# Altium PCB Vent_pcb.PcbDoc
Units mm, origin at the board's own origin, x right, y up, seen from the top; angles counter-clockwise.
Board outline 60 x 90 mm, 2 copper layers (Top Layer, Bottom Layer); 56 components, 64 nets, 202 pads, 38 vias.
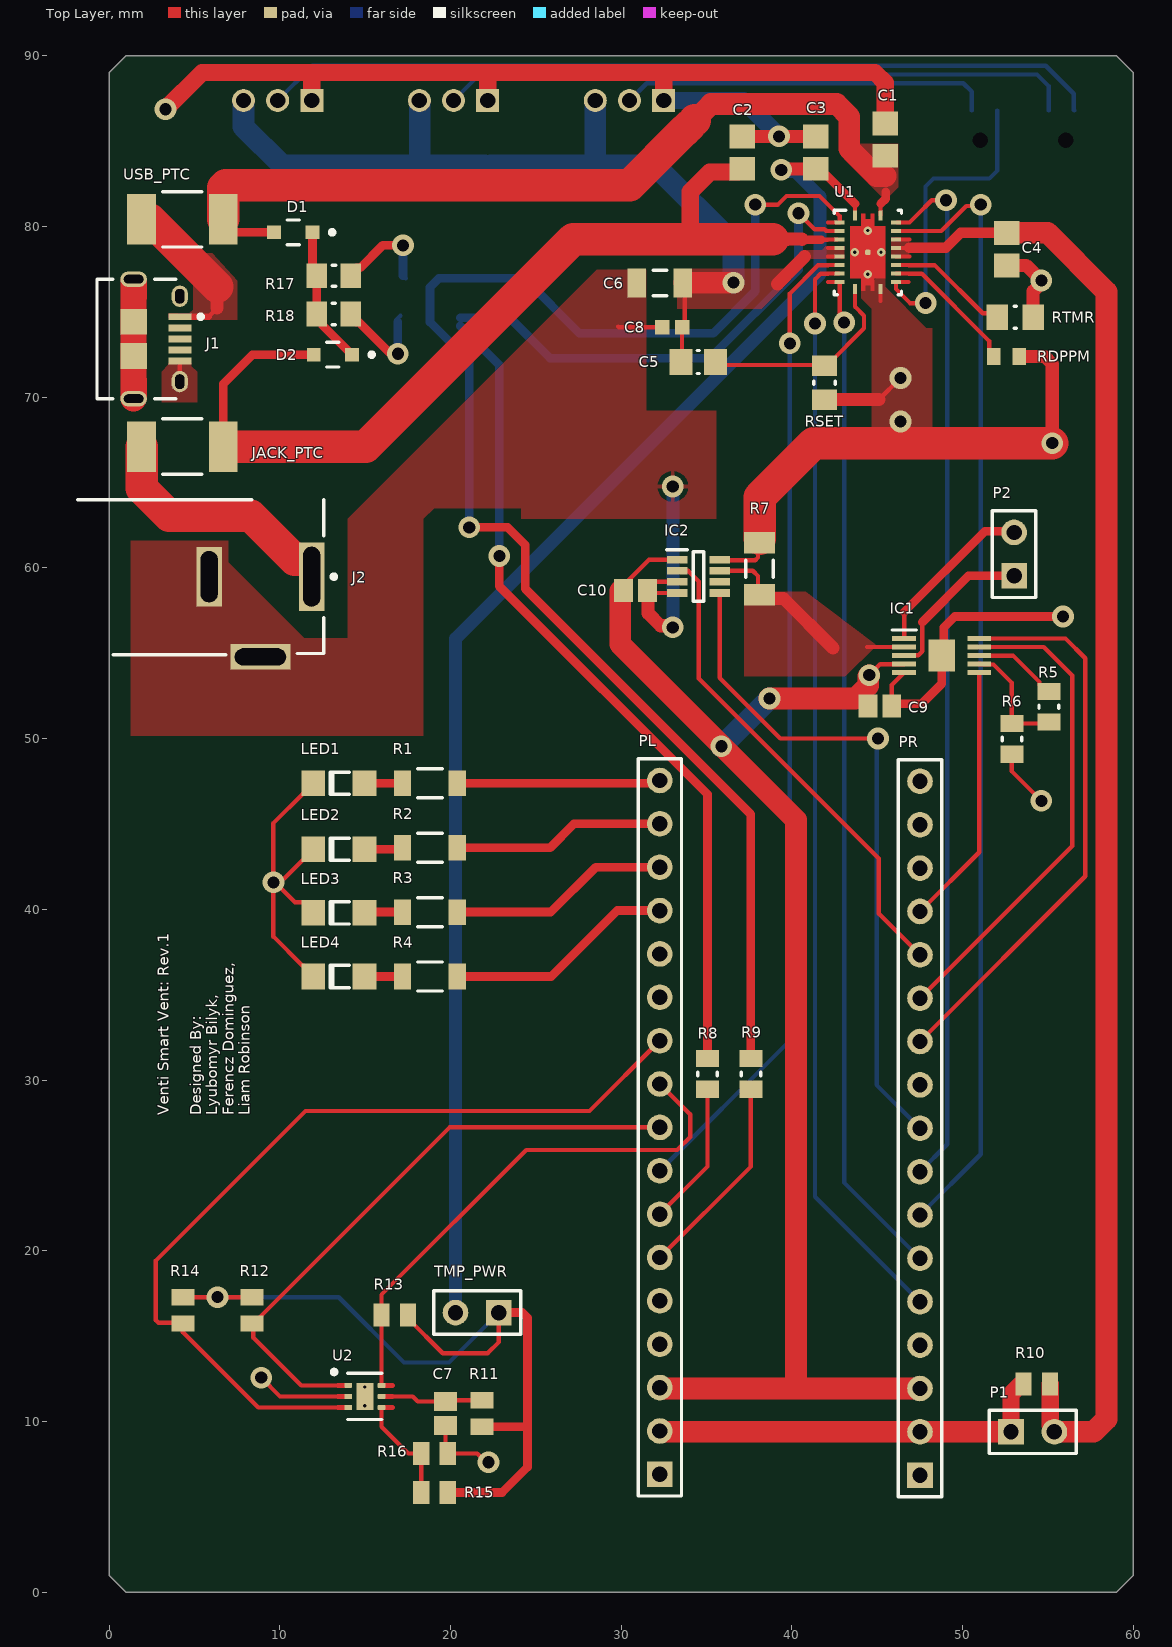
[diagram p0: Top Layer view]
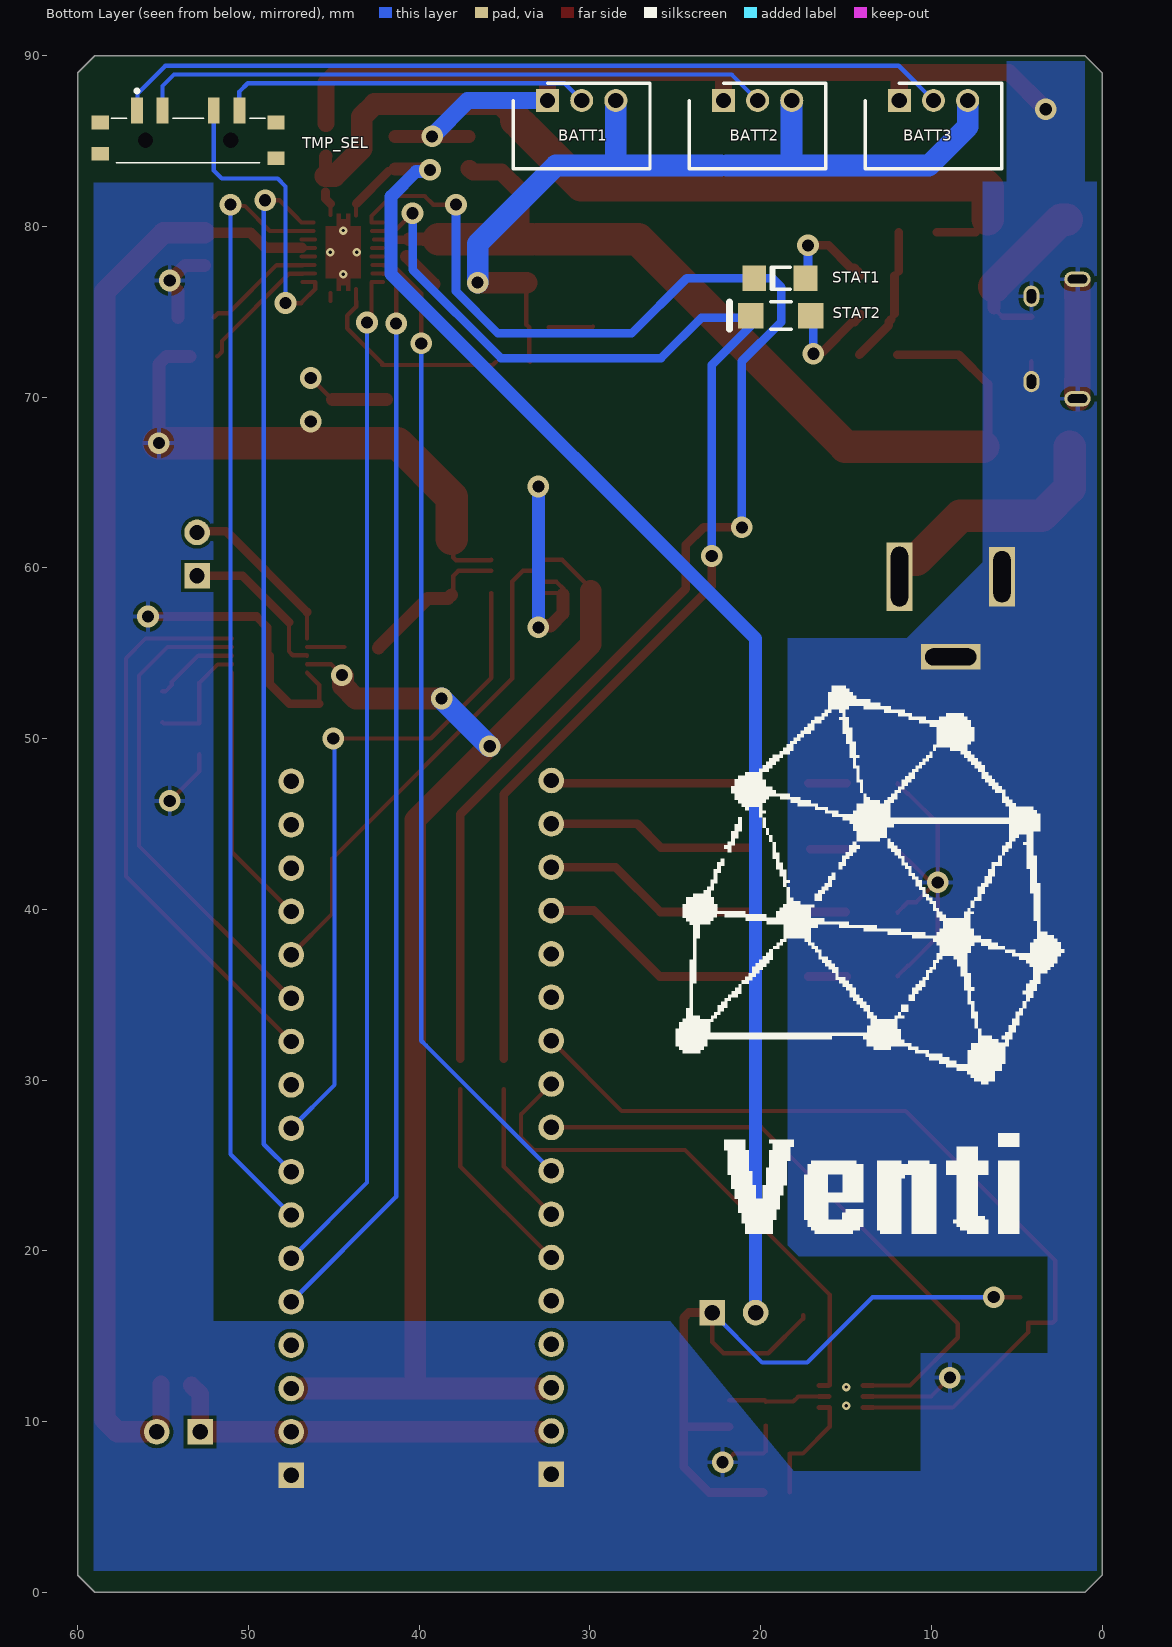
[diagram p1: Bottom Layer view, seen from below]
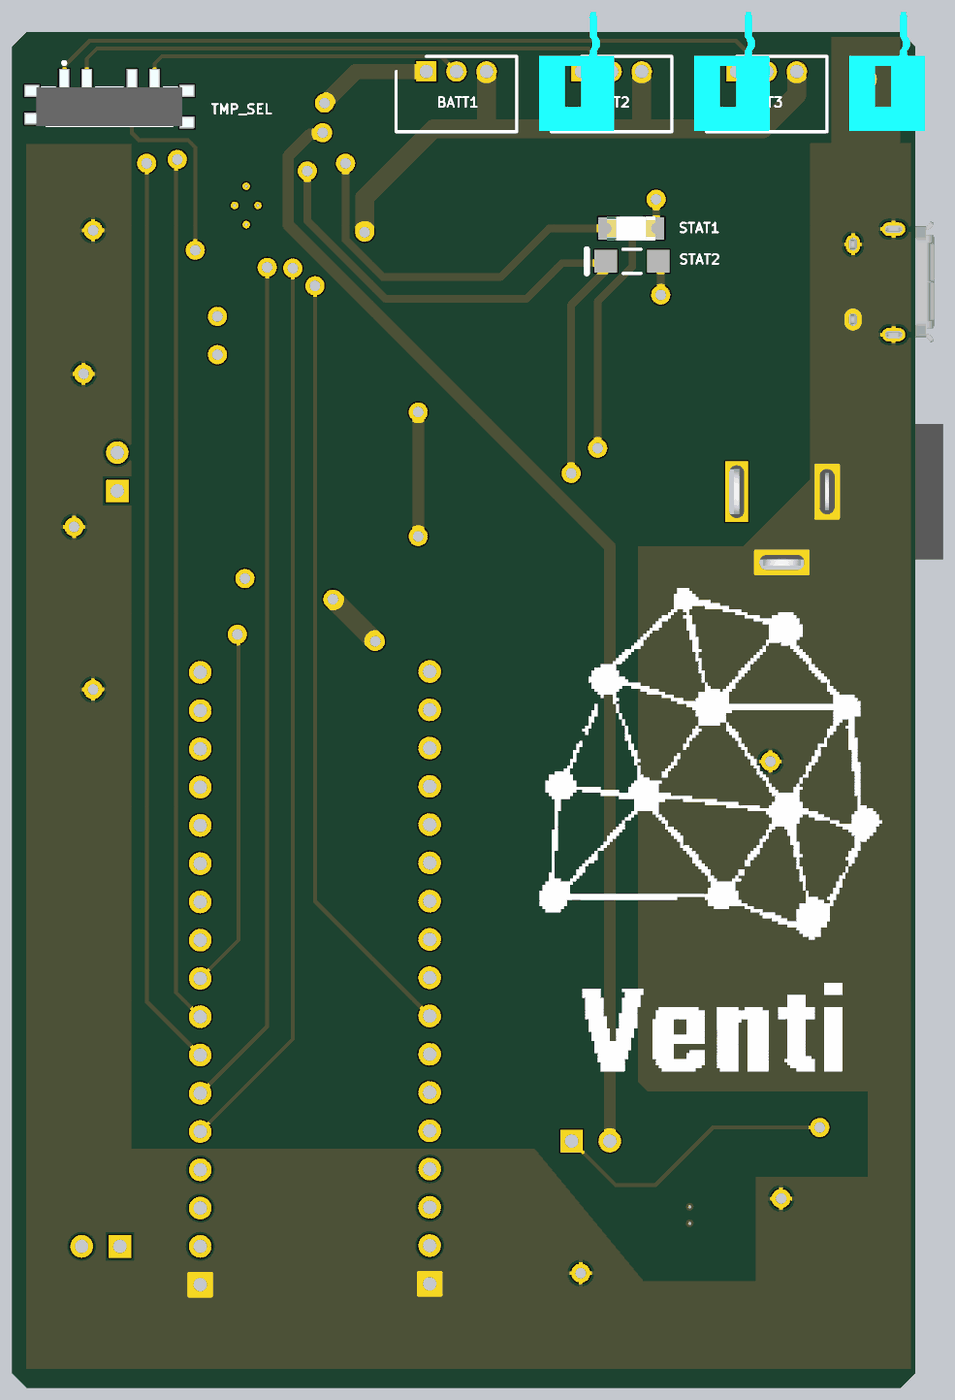
[diagram p2: 3D render of the assembled board from below, using the file's embedded part models]

## Layer stack, top to bottom
Top Solder: solder mask 0.0102, Solder Resist, Dk 3.5
Top Layer: signal copper 0.0356
Dielectric 1: dielectric 0.32, FR-4, Dk 4.8
Bottom Layer: signal copper 0.0356
Bottom Solder: solder mask 0.0102, Solder Resist, Dk 3.5

## Board outline
0,1 0,89 1,90 59,90 60,89 60,1 59,0 1,0

## Design rules (kind name [scope] priority, off if disabled: settings)
Clearance [All] p1: gap=0.203 ignorepadtopadclearanceinfootprint=TRUE except(0: THPad-Hole Via-Hole Fill-Hole Poly-Hole Region-Hole Text-Hole)
PolygonConnect [All] p1: connectstyle=Relief reliefconductorwidth=0.254 reliefentries=4 polygonreliefangle="90 Angle" airgapwidth=0.254
RoutingVias [All] p1: holewidth=0.711 width=1.27 viastyle="Through Hole" minholewidth=0.711 minwidth=1.27 maxholewidth=0.711 maxwidth=1.27
SolderMaskExpansion [All] p1: expansion=0.102
Width [All] p1: maxlimit=1200 minlimit=0.254 preferedwidth=0.254
30 further rules are at their usual default settings.

## Classes and differential pairs
component class U_temp_sensor: C7 R11 R12 R13 R14 R15 R16 U2
component class U_sparkfun_nrf52: PL PR
component class U_dc_motor: C9 C10 IC1 IC2 R5 R6 R7
component class "U_Charge and System Power-path Management Circuit For Vent": BATT1 BATT2 BATT3 C1 C2 C3 C4 C5 C6 C8 D1 D2 J1 J2 JACK_PTC R17 R18 RDPPM RSET RTMR STAT1 STAT2 TMP_SEL U1 USB_PTC
component class main_schematic: LED1 LED2 LED3 LED4 P1 P2 R1 R2 R3 R4 R8 R9 R10 TMP_PWR

## Components (designator, comment, footprint, x,y, rotation, side; value= is the part's Value field where it differs from the comment)
BATT1 "DF3A-3P-2DSA" SHDR3W50P0X200_1X3_800X500X500P 32.48,87.376 r0 bottom
BATT2 "DF3A-3P-2DSA" SHDR3W50P0X200_1X3_800X500X500P 22.177,87.376 r0 bottom
BATT3 "DF3A-3P-2DSA" SHDR3W50P0X200_1X3_800X500X500P 11.874,87.376 r0 bottom
C1 "10uF 25V" CAPC2013X135X45ML10T25 45.457,85.09 r270 top
C2 "10uF 25V" CAPC2013X135X45ML10T25 37.084,84.328 r270 top
C3 "10uF 25V" CAPC2013X135X45ML10T25 41.402,84.328 r270 top
C4 "10uF 25V" CAPC2013X135X45ML10T25 52.569,78.674 r90 top
C5 "220nF 25V 0805" CAPC0805(2012)100_M 34.51,72.06 r180 top value=220nF
C6 "C3216X5R1C336M160AB" C1206 32.258,76.683 r0 top
C7 "0.1u" CAPC2013X145X50LL20T25 19.709,10.468 r90 top
C8 "1 uF 25V" CAPC1608X90X35LL10T25 32.986,74.092 r0 top
C9 "0.1 uF" CAPC2013X145X50LL20T25 45.147,51.918 r180 top
C10 "0.1 uF" CAPC2013X145X50LL20T25 30.836,58.674 r180 top
D1 "MM3Z3V3B" FP-MM3Z3V3B-MFG 10.79,79.654 r0 top
D2 "MM3Z3V3B" FP-MM3Z3V3B-MFG 13.106,72.492 r0 top
IC1 "DRV8832DGQ" SOP50P490X110-11N 48.768,54.864 r0 top
IC2 "INA186A3IDDFT" SOT65P280X110-8N 34.524,59.507 r0 top
J1 "10118194-0001LF" FCI-10118194-0001LF-5_V 2.793,73.411 r270 top
J2 "PJ-002A" CUI-PJ-002A_V 8.865,59.487 r180 top
JACK_PTC "MF-MSMF110/24X-2" BOUR-MF-MSMF110-24X-2_V 4.293,67.107 r0 top
LED1 "" 1206_A 13.462,47.387 r0 top
LED2 "" 1206_A 13.462,43.519 r0 top
LED3 "" 1206_A 13.462,39.793 r0 top
LED4 "" 1206_A 13.462,36.068 r0 top
P1 "Header 2" HDR1X2 52.832,9.398 r0 top
P2 "Header 2" HDR1X2 53.01,59.538 r90 top
PL "Header 17" HDR1X17 32.258,6.909 r90 top
PR "Header 17" HDR1X17 47.498,6.858 r90 top
R1 "" FP-RC1206-MFG#1 18.796,47.387 r0 top value=0O
R2 "" FP-RC1206-MFG#1 18.796,43.614 r0 top value=0O
R3 "" FP-RC1206-MFG#1 18.796,39.841 r0 top value=0O
R4 "" FP-RC1206-MFG#2 18.796,36.068 r0 top value=0O
R5 "141k" RESC2013X60X35NL10T20 55.042,51.867 r90 top
R6 "47k" RESC2013X60X35NL10T20 52.883,49.987 r90 top
R7 "Rshunt, 300m" RESC3116X65X40ML10T20 38.1,59.944 r270 top
R8 "RC0805FR-0710KL" RESC2013X60X35NL10T20 35.052,30.364 r270 top
R9 "RC0805FR-0710KL" RESC2013X60X35NL10T20 37.592,30.364 r270 top
R10 "0" RESC2013X70X40LL20T20 54.343,12.192 r0 top
R11 "470" RESC2013X70X40LL20T20 21.844,10.468 r270 top
R12 "5k" RESC2013X70X40LL20T20 8.382,16.51 r90 top
R13 "5k" RESC2013X70X40LL20T20 16.739,16.231 r0 top
R14 "5k" RESC2013X70X40LL20T20 4.318,16.51 r90 top
R15 "0" RESC2013X70X40LL20T20 19.063,5.842 r0 top
R16 "0" RESC2013X70X40LL20T20 19.063,8.128 r180 top
R17 "1K 0805" RESC2013X60X35ML10T20 13.169,77.114 r180 top
R18 "1K 0805" RESC2013X60X35ML10T20 13.157,74.879 r180 top
RDPPM "37.4 K 0603" RESC1608X55X25ML10T15 52.569,72.39 r180 top
RSET "1K 0805" RESC2013X60X35ML10T20 41.91,70.85 r90 top
RTMR "60K4 1% 0805(2012)" RESC0805(2012)_M 53.077,74.676 r180 top value="60400.00 Ohm"
STAT1 "" 1206_A 18.872,76.962 r180 bottom
STAT2 "LTST-C150KRKT" LTST-C150KRKT_V 18.821,74.778 r0 bottom
TMP_PWR "Header 2" HDR1X2 22.835,16.383 r180 top
TMP_SEL "EG1315AA" EG1315AA 53.532,85.039 r180 bottom
U1 "BQ24032ARHLR" RHL0020A_V 44.441,78.486 r0 top
U2 "TMP116NAIDRVT" FP-DRV0006A-MFG 14.986,11.472 r0 top
USB_PTC "MF-MSMF110/24X-2" BOUR-MF-MSMF110-24X-2_V 4.295,80.416 r0 top

## Footprints (in the part's own frame and the unit in brackets; to place one, negate y for a bottom-side part, rotate by r counter-clockwise, add the part's x,y. Pads: shape width x height; smd on the part's side, far side on the other; paste and mask are expansions set on the pad)
1206_A [mm] "Chip LED, 2-Leads, Body 3.2x1.6mm, IPC Medium Density"
  rect 1.4x1.5 smd: 1(-1.5,0) 2(1.5,0)
  silkscreen extent -0.5,-0.66 0.6,0.65, body extent -1.6,-0.8 1.6,0.8, height 0.68
BOUR-MF-MSMF110-24X-2_V [mm] "Chip Fuse, 2-Leads, Body 4.6x3.24mm"
  rect 1.68x2.95 smd: 1(-2.39,0) 2(2.39,0)
  silkscreen extent -1.15,-1.62 1.15,1.62, body extent -2.3,-1.62 2.3,1.62, height 1.15
C1206 [mm] "Chip Capacitor, Body 3.2x1.6mm, IPC High Density"
  rect 1.1x1.7 smd: 1(-1.35,0) 2(1.35,0)
  silkscreen extent -0.4,-0.75 0.4,0.75, body extent -1.7,-0.9 1.7,0.9, height 1.3
CAPC0805(2012)100_M [mm] "Chip Capacitor, Body 2.0x1.2mm, Height 1.0mm, IPC Low Density"
  rect 1.35x1.55 smd: 1(-1,0) 2(1,0)
  silkscreen extent -0.05,-0.67 0.05,0.67, body extent -1.1,-0.72 1.1,0.72, height 1
CAPC1608X90X35LL10T25 [mm] "Chip Capacitor, 2-Leads, Body 1.70x0.90mm, IPC High Density"
  rect 0.85x0.85 smd: 1(-0.575,0) 2(0.575,0)
  body extent -0.85,-0.45 0.85,0.45, height 0.9
CAPC2013X135X45ML10T25 [mm] "Chip Capacitor, 2-Leads, Body 2.00x1.25mm, IPC Low Density"
  rect 1.4x1.5 smd: 1(-0.95,0) 2(0.95,0)
  body extent -1.05,-0.67 1.05,0.67, height 1.35
CAPC2013X145X50LL20T25 [mm] "Chip Capacitor, 2-Leads, Body 2.00x1.25mm, IPC High Density"
  rect 1.1x1.35 smd: 1(-0.7,0) 2(0.7,0)
  body extent -1.1,-0.72 1.1,0.72, height 1.45
CUI-PJ-002A_V [mm] "THD, 3-Leads, Body 14.4x9mm, Height 11mm"
  rect 1.5x4 hole 1 slot 3.5 at 90 deg: 1(-3,0)
  rect 1.5x3.5 hole 1 slot 3 at 90 deg: 2(3,0)
  rect 3.5x1.5 hole 1 slot 3 at 0 deg: 3(0,4.7)
  silkscreen extent -4.43,-4.5 10.7,4.57, body extent -3.7,-4.5 10.7,4.9, height 11
EG1315AA [mm]
  rect 0.7x1.5 smd: 1(-3,1.75) 2(-1.5,1.75) 3(1.5,1.75) 4(3,1.75)
  round 0.45 hole 0.9 unplated: MH1(-2.5,0) MH2(2.5,0)
  rect 1x0.8 smd: MP1(-5.15,1.05) MP2(-5.15,-0.79) MP3(5.15,-1.05) MP4(5.15,1.05)
  silkscreen extent -4.5,-1.3 4.5,3, body extent -5.57,-1.37 5.57,2.43, height 1.5
FCI-10118194-0001LF-5_V [mm] "SMD, 5-Leads, Body 7x5mm, Pitch 0.65 mm"
  rect 0.4x1.35 smd: 1(-1.3,1.35) 2(-0.65,1.35) 3(0,1.35) 4(0.65,1.35) 5(1.3,1.35)
  oval 1.25x0.95 hole 0.55 slot 0.85 at 0 deg: 6(-2.5,1.35) 7(2.5,1.35)
  oval 0.9x1.55 hole 0.5 slot 1.15 at 90 deg: 8(-3.5,-1.35) 9(3.5,-1.35)
  rect 1.5x1.55 smd: 10(-1,-1.35) 11(1,-1.35)
  Top Layer region: -2.3,-2.125 -2.3,-0.575 -3.5,-0.575 -3.5,-2.125
  Top Layer region: 3.5,-2.125 3.5,-0.575 2.3,-0.575 2.3,-2.125
  silkscreen extent -3.5,-3.5 3.5,2.7, body extent -4.02,-4.03 4.02,1.55, height 2.72
FP-DRV0006A-MFG [mm]
  rrect33% 0.45x0.3 smd paste+0 mask+0: 1(-0.975,0.65) 2(-0.975,0) 3(-0.975,-0.65) 4(0.975,-0.65) 5(0.975,0) 6(0.975,0.65)
  rrect10% 1x1.6 smd paste-1000 mask+0: 7(0,0)
  silkscreen extent -1.93,-1.35 1,1.56, body extent -1.3,-1.15 1.3,1.15, height 0.25
FP-MM3Z3V3B-MFG [mm]
  rect 0.8x0.8 smd paste+0 mask+0: 1(-1.125,0) 2(1.125,0)
  silkscreen extent -0.35,-0.72 2.4,0.72, body extent -1.63,-0.82 1.63,0.82, height 0.25
FP-RC1206-MFG#1 [mm]
  rect 1x1.5 smd: 1(-1.6,0) 2(1.6,0)
  silkscreen extent -0.72,-0.85 0.72,0.85, body extent -2.2,-0.95 2.2,0.95, height 0.25
FP-RC1206-MFG#2 [mm]
  rect 1x1.5 smd paste+0 mask+0: 1(-1.6,0) 2(1.6,0)
  silkscreen extent -0.72,-0.85 0.72,0.85, body extent -2.2,-0.95 2.2,0.95, height 0.25
HDR1X2 [mm] "Connector; Header; 2 Position"
  rect 1.5x1.5 hole 0.9: 1(0,0)
  round 1.5 hole 0.9: 2(2.54,0)
  silkscreen extent -1.27,-1.27 3.81,1.27
HDR1X17 [mm] "Connector; Header; 17 Position"
  rect 1.5x1.5 hole 0.9: 1(0,0)
  round 1.5 hole 0.9: 2(2.54,0) 3(5.08,0) 4(7.62,0) 5(10.16,0) 6(12.7,0) 7(15.24,0) 8(17.78,0) 9(20.32,0) 10(22.86,0) 11(25.4,0) 12(27.94,0) 13(30.48,0) 14(33.02,0) 15(35.56,0) 16(38.1,0) 17(40.64,0)
  silkscreen extent -1.27,-1.27 41.91,1.27
LTST-C150KRKT_V [mm] "SMD, 2-Leads, Body 3.2x1.6mm"
  rect 1.5x1.5 smd: 1(-1.75,0) 2(1.75,0)
  silkscreen extent -0.6,-0.8 3,0.8, body extent -1.6,-0.8 1.6,0.8, height 1.2
RESC0805(2012)_M [mm] "Chip Resistor, Body 2.0x1.3mm, IPC Low Density"
  rect 1.25x1.5 smd: 1(-1.05,0) 2(1.05,0)
  silkscreen extent -0.05,-0.65 0.05,0.65, body extent -1.1,-0.67 1.1,0.67, height 0.7
RESC1608X55X25ML10T15 [mm] "Chip Resistor, 2-Leads, Body 1.60x0.80mm, IPC Low Density"
  rect 0.8x1 smd: 1(-0.75,0) 2(0.75,0)
  body extent -0.85,-0.45 0.85,0.45, height 0.55
RESC2013X60X35ML10T20 [mm] "Chip Resistor, 2-Leads, Body 2.1x1.35mm, IPC Low Density"
  rect 1.2x1.45 smd: 1(-1,0) 2(1,0)
  silkscreen extent -0.1,-0.63 0.1,0.63, body extent -1.05,-0.68 1.05,0.67, height 0.6
RESC2013X60X35NL10T20 [mm] "Chip Resistor, 2-Leads, Body 2.1x1.35mm, IPC Medium Density"
  rect 1x1.35 smd: 1(-0.9,0) 2(0.9,0)
  silkscreen extent -0.1,-0.58 0.1,0.58, body extent -1.05,-0.68 1.05,0.67, height 0.6
RESC2013X70X40LL20T20 [mm] "Chip Resistor, 2-Leads, Body 2.00x1.25mm, IPC High Density"
  rect 0.95x1.35 smd: 1(-0.775,0) 2(0.775,0)
  body extent -1.1,-0.72 1.1,0.72, height 0.7
RESC3116X65X40ML10T20 [mm] "Chip Resistor, 2-Leads, Body 3.10x1.60mm, IPC Low Density"
  rect 1.25x1.8 smd: 1(-1.525,0) 2(1.525,0)
  silkscreen extent -0.5,-0.8 0.5,0.8, body extent -1.6,-0.85 1.6,0.85, height 0.65
RHL0020A_V [mm] "QFN, 20-Leads, Body 4.5x3.5mm, Pitch 0.5mm, Thermal Pad 3.05x2.05mm, TI Recommended"
  rrect42% 0.24x0.6 smd: 1(-0.75,2.15) 10(-0.75,-2.15) 11(0.75,-2.15) 20(0.75,2.15)
  rrect42% 0.6x0.24 smd: 2(-1.65,1.75) 3(-1.65,1.25) 4(-1.65,0.75) 5(-1.65,0.25) 6(-1.65,-0.25) 7(-1.65,-0.75) 8(-1.65,-1.25) 9(-1.65,-1.75) 12(1.65,-1.75) 13(1.65,-1.25) 14(1.65,-0.75) 15(1.65,-0.25) 16(1.65,0.25) 17(1.65,0.75) 18(1.65,1.25) 19(1.65,1.75)
  rrect33% 0.3x0.3 smd paste-0.15 mask+0: 21(0,0)
  Top Layer region: 0.16,2.25 0.16,1.925 -0.16,1.925 -0.16,2.25 -0.39,2.25 -0.39,1.525 -1.025,1.525 -1.025,-1.525 -0.39,-1.525 -0.39,-2.25 -0.16,-2.25 -0.16,-1.925 0.16,-1.925 0.16,-2.25 0.39,-2.25 0.39,-1.525 1.025,-1.525 1.025,1.525 0.39,1.525 0.39,2.25
  silkscreen extent -1.98,-2.47 1.98,2.47, body extent -1.82,-2.33 1.83,2.32, height 1.01
SHDR3W50P0X200_1X3_800X500X500P [mm]
  rect 1.35x1.35 hole 0.9: 1(0,0)
  round 1.35 hole 0.9: 2(-2,0) 3(-4,0)
  silkscreen extent -6,-1 2,4, body extent -12.48,-3.95 -7.48,3.95, height 3.55
SOP50P490X110-11N [mm]
  rect 1.4x0.3 smd: 1(-2.2,1) 2(-2.2,0.5) 3(-2.2,0) 4(-2.2,-0.5) 5(-2.2,-1) 6(2.2,-1) 7(2.2,-0.5) 8(2.2,0) 9(2.2,0.5) 10(2.2,1)
  rect 1.57x1.88 smd: 11(0,0)
  silkscreen extent -2.9,1.5 -1.5,1.5, body extent -2.45,-1.5 2.45,1.5, height 1.1
SOT65P280X110-8N [mm]
  rect 1.2x0.45 smd: 1(-1.25,0.975) 2(-1.25,0.325) 3(-1.25,-0.325) 4(-1.25,-0.975) 5(1.25,-0.975) 6(1.25,-0.325) 7(1.25,0.325) 8(1.25,0.975)
  silkscreen extent -1.85,-1.45 0.3,1.55, body extent -1.4,-1.45 1.4,1.45, height 1.1

## Part data
BATT1 BATT2 BATT3: "Connector", Manufacturer_Name=Hirose, Mouser Part Number=798-DF3A-3P-2DSA, Arrow Part Number=DF3A-3P-2DSA, Datasheet Link=https://componentsearchengine.com/Datasheets/2/DF3A-3P-2DSA.pdf, Height=5mm, Manufacturer_Part_Number=DF3A-3P-2DSA, Mouser Price/Stock=https://www.mouser.co.uk/ProductDetail/Hirose-Connector/DF3A-3P-2DSA?qs=Ux3WWAnHpjDjdLpYq8Mr3A%3D%3D
C1 C2 C3 C4: library part CMP-2007-03541-1, Manufacturer=Murata, Part Number=GRM21BR61E106KA73L
C5: library part CMP-1036-04543-1, "CAP 220nF 25V ±10% 0805 (2012 Metric) Thickness 1mm SMD", Case-EIA=0805, Case-Metric=2012, Rated voltage="25 V", Tolerance=±10%, Max Thickness="1 mm", Technology=SMT
C6: "Capacitor", Manufacturer_Name=TDK, Mouser Part Number=810-C3216X5R1C336M, Arrow Part Number=C3216X5R1C336M160AB, Arrow Price/Stock=https://www.arrow.com/en/products/c3216x5r1c336m160ab/tdk, Datasheet Link=https://product.tdk.com/info/en/catalog/datasheets/mlcc_commercial_midvoltage_en.pdf, Height=1.8mm, Manufacturer_Part_Number=C3216X5R1C336M160AB, Mouser Price/Stock=https://www.mouser.com/Search/Refine.aspx?Keyword=810-C3216X5R1C336M
C7: library part CMP-2007-01258-1, "C0805C104Z5VACTU", Manufacturer=Kemet, Part Number=C0805C104Z5VACTU
C8: library part CMP-2000-07260-1, "Chip Capacitor, 1 uF, +/- 10%, 25 V, -55 to 85 degC, 0603 (1608 Metric), RoHS, Tape and Reel", Capacitance=1µF, Manufacturer="Taiyo Yuden", Operating Temperature=-55°C~85°C, Package / Case=0603(1608Metric), Package Description="2-Pin Surface Mount Device, Body 1.6 x 0.8 mm", Package Reference=0603, PCN Part Number=X5R,X7RDielectrics23/Jan/2008, Ratings=-, Standard Package=1, Temperature Coefficient=X5R, Tolerance=±10%, Voltage - Rated=25V, Applications=GeneralPurpose, Catalog Drawings=xMKSeries_0603_0.8, Category=Capacitors, Datasheet URL=http://ds.yuden.co.jp/TYCOMPAS/ut/detail.do?productNo=TMK107BJ105KA-T&fileName=TMK107BJ105KA-T_SS&mode=specSheetDownload, Datasheet Version=09/2016, Family=CeramicCapacitors, Features=-, Height - Seated (Max)=-, Kits=587-1797-KIT-ND-KITCAPCERHICAP0603&0805S, Lead Spacing=-, Lead Style=-, Manufacturer URL=http://www.t-yuden.com/, Mounting Technology=SurfaceMount, Mounting Type=SurfaceMount,MLCC, Online Catalog=MSeries, Other Names=587-1248-1, Packaging=CutTape(CT), Series=M, Size / Dimension="0.063\"Lx0.031\"W(1.60mmx0.80mm)", Thickness (Max)="0.035\"(0.90mm)"
C9 C10: library part CMP-2007-01258-1, Manufacturer=Kemet, Part Number=C0805C104Z5VACTU
D1 D2: library part CMP-07164-000001-1, "DIODE ZENER 3.3V 200MW SOD323F", Forward Current=10mA, Manufacturer="ON Semiconductor", Max Junction Temp=+150°C, Max Reverse Leakage Current=4.5uA, Max Zener Voltage=3.37V, Nom Zener Voltage=3.3V, Power Dissipation=200mW, Reverse Voltage=1V, Temperature="to +150°C", Automotive=No, Category=Diode, ComponentLink2Description=Datasheet, ComponentLink2URL=https://www.onsemi.com/pub/Collateral/MM3Z9V1B-D.pdf, Device Class L1="Discrete Semiconductors", Device Class L2=Diodes, Device Class L3="Zener Diodes", Digikey Description="DIODE ZENER 3.3V 200MW SOD323F", Height=1mm, Lead Free=Yes, Manufacturer Part Number=MM3Z3V3B, Mouser Description="Zener Diodes Diode Zener 3.3V 200mW 2%", Octopart=https://octopart.com/mm3z3v3b-on+semiconductor-84329878, Package=MM3Z3V3B, RoHS=TRUE, Temperature Range High=+150°C, Zener Impedance=89O
IC1: "Integrated Circuit", Manufacturer_Name="Texas Instruments", Mouser Part Number=595-DRV8832DGQ, Arrow Part Number=DRV8832DGQ, Arrow Price/Stock=https://www.arrow.com/en/products/drv8832dgq/texas-instruments, Datasheet Link=http://datasheet.octopart.com/DRV8832DGQ-Texas-Instruments-datasheet-10258026.pdf, Height=1.1mm, Manufacturer_Part_Number=DRV8832DGQ, Mouser Price/Stock=https://www.mouser.co.uk/ProductDetail/Texas-Instruments/DRV8832DGQ?qs=O1HRStiETChGrPfF5MJfDw%3D%3D
IC2: "Integrated Circuit", Manufacturer_Name="Texas Instruments", Arrow Part Number=INA186A3IDDFT, Datasheet Link=https://www.ti.com/lit/ds/symlink/ina186.pdf?ts=1591829586496&ref_url=https://www.ti.com/product/INA186, Height=1.45mm, Manufacturer_Part_Number=INA186A3IDDFT
J1: library part CMP-2000-05120-1, "Micro USB B Type Receptacle, 1.8 A, -55 to 85 degC, 5-Pin SMD, RoHS, Tape and Reel", Manufacturer="Amphenol FCI", Package Description="5-Pin Surface Mount Device, Body 8.05 x 5.53 mm, Pitch 0.65 mm", Package Reference=10118194-0001LF-5, Body Orientation=RightAngle, Datasheet URL=https://datasheet.ciiva.com/26945/getdatasheetpartid-418619-26945695.pdf, Datasheet Version="Rev. A, 10/2011", Gender=RCP, Manufacturer URL=http://www.fci.com/, Mounting=SurfaceMount, Number of Contacts=5, Packaging=CutTape, Pitch=0.65mm, Rad Hard=No, Termination Method=Solder, Type=MicroUSBTypeB
J2: library part CMP-2000-06895-1, "Through Hole Right Angle DC Power Jack, 2.5 A, 2 mm Center Pin, 3 Position, -25 to 85 degC, RoHS, Bulk", Current Rating=2.5A, Flammability Rating=UL94V-0, Insulation Resistance=50MOhms, Manufacturer=CUIInc., Operating Temperature Range=-25Cto+85C, Package Description="3-Pin Through Hole Device, Body 14.4 x 9 mm, Height 11 mm", Voltage Rating=24V, Brand=CUI, Connector Type=DCPowerJack, Contact Gender=Male, Contact Material=Copper, Contact Plating=Nickel, Datasheet URL=http://www.cui.com/product/resource/pj-002a.pdf, Datasheet Version="Rev. 1.03, 04/2016", Factory Pack Quantity=500, Housing Material=PolybutyleneTerephthalate(PBT), Inside Contact Diameter=2mm, Manufacturer URL=http://www.cui.com/, Mounting Angle=Right, Mounting Style=ThroughHole, Mounting Technology=ThroughHole, Outside Contact Diameter=6.5mm, Package Reference=PJ-002A, Product=Jacks, Product Category=DCPowerConnectors, RoHS=True, Termination Style=ThroughHole
JACK_PTC USB_PTC: library part CMP-2100-03655-1, "PTC Resettable Fuse, 24 V, 1.1 A, -40 to 85 degC, 2-Pin SMD, RoHS, Tape and Reel", Case Code (Imperial)=1812, Case Code (Metric)=4532, Manufacturer=Bourns, Max Current Rating=20A, Max Operating Temperature=85degC, Min Operating Temperature=-40degC, Package Description="2-Pin Surface Mount Device, Body 4.6 x 3.24 mm", Package Reference=MF-MSMF110-24X-2, Power Dissipation=800mW, Supply Voltage=24V, Case/Package=1812, Contact Plating=Gold, Datasheet URL=http://www.bourns.com/docs/Product-Datasheets/mfmsmf.pdf, Datasheet Version="Rev. AG, 08/2016", Height=1.6mm, Length=4.83mm, Manufacturer URL=http://www.bourns.com/, Mount=SurfaceMount, Number of Terminals=2, Packaging=TapeandReel, Radiation Hardening=No, REACH SVHC=NoSVHC, RoHSCompliant=true, Voltage Rating=24V, Voltage Rating (DC)=24V, Width=3.41mm
LED1 LED2 LED3 LED4: library part CMP-1426-00016-1, "QTLP650C4TR / 1206 green led", Color="Bright Green", Manufacturer="Wuerth Elektronik", PartNumber=150120VS75000, ComponentLink1Description="Manufacturer URL", ComponentLink1URL=http://www.we-online.com, ComponentLink2Description=Datasheet, ComponentLink2URL=http://katalog.we-online.com/led/datasheet/150120VS75000.pdf, PackageReference=1206_A
P1 P2 TMP_PWR: "Header, 2-Pin", LatestRevisionDate=17-Jul-2002, LatestRevisionNote="Re-released for DXP Platform.", Publisher="Altium Limited"
PL PR: "Header, 17-Pin", LatestRevisionDate=17-Jul-2002, LatestRevisionNote="Re-released for DXP Platform.", Publisher="Altium Limited"
R1 R2 R3 R4: library part CMP-03412-007570-1, "360 ohms resistor  / 1206 package", Manufacturer=YAGEO, Manufacturer Part Number=RC1206JR-070RL, Package=RC1206, Power Rating=0.25W, Resistance=0O, Temperature="-55°C to +155°C", Temperature Coefficient=300ppm/°C, Temperature Range High=+155°C, Temperature Range Low=-55°C, Tolerance=5%, Voltage Rating=200V, Automotive=No, Category=Res, ComponentLink2Description=Datasheet, ComponentLink2URL=https://www.yageo.com/upload/media/product/productsearch/datasheet/rchip/PYu-RC_Group_51_RoHS_L_10.pdf, Composition="Thick Film", Device Class L1="Passive Components", Device Class L2=Resistors, Device Class L3="Chip SMD Resistors", Digikey Description="RES SMD 0 OHM JUMPER 1/4W 1206", Footprint Url=https://www.yageo.com/upload/website/yageo_PYu-R_Mount_10_19050818_343.pdf, Height=0.65mm, Ipc Land Pattern Name=RESC310160X55, Lead Free=Yes, Mouser Description="Resistor: thick film; SMD; 1206; 0O; 0.25W; ±5%; -55÷155°C", Octopart=https://octopart.com/rc1206jr-070rl-yageo-40025601, RoHS=TRUE, Series=RC
R5: library part CMP-1659-00011-4, "ERJ-6ENF1403V 141K", Manufacturer=Yageo, Max Operating Temperature="155 degC", Min Operating Temperature="-55 degC", Package Quantity=200, Voltage Rating="150 V", ComponentLink1Description="Manufacturer URL", ComponentLink1URL=http://www.yageo.com/, ComponentLink2Description=Datasheet, ComponentLink2URL=http://www.yageo.com/documents/recent/PYu-RC_Group_51_RoHS_L_04.pdf, DatasheetVersion="Rev. 4, 02/2016", Height="0.5 mm", Length="2 mm", Mount="Surface Mount", Mounting Technology="Surface Mount", PackageDescription="2-Pin Surface Mounted Device, Body 2 x 1.25 mm", PackageReference=0805, Packaging="Tape and Reel", Pins=2, REACH SVHC="No SVHC", RoHSCompliant=true
R6: library part CMP-1659-00011-4, "Chip Resistor, 47 KOhm, +/- 1%, 0.125 W, -55 to 155 degC, 0805 (2012 Metric), RoHS, Tape and Reel, RC0805FR-0747KL", Manufacturer=Yageo, Max Operating Temperature="155 degC", Min Operating Temperature="-55 degC", Package Quantity=200, Voltage Rating="150 V", ComponentLink1Description="Manufacturer URL", ComponentLink1URL=http://www.yageo.com/, ComponentLink2Description=Datasheet, ComponentLink2URL=http://www.yageo.com/documents/recent/PYu-RC_Group_51_RoHS_L_04.pdf, DatasheetVersion="Rev. 4, 02/2016", Height="0.5 mm", Length="2 mm", Mount="Surface Mount", Mounting Technology="Surface Mount", PackageDescription="2-Pin Surface Mounted Device, Body 2 x 1.25 mm", PackageReference=0805, Packaging="Tape and Reel", Pins=2, REACH SVHC="No SVHC", RoHSCompliant=true
R7: library part CMP-2100-03678-1, "CSR1206FKR300 / RES 0.3 OHM 1% 1/2W 1206", Case Code (Imperial)=1206, Case Code (Metric)=3216, Manufacturer=Yageo, Max Operating Temperature=155degC, Min Operating Temperature=-55degC, Package Description="2-Pin Surface Mount Device, Body 3.1 x 1.6 mm", Package Reference=1206.0, Power Rating=250mW, Resistance=1KOhm, Temperature Coefficient=100ppm/degreesC, Tolerance=1%, Voltage Rating=200V, Case/Package=1206, Composition=ThickFilm, Datasheet URL=http://www.yageo.com/NewPortal/yageodocoutput?fileName=/pdf/R-Chip/PYu-RC_Group_51_RoHS_L_5.pdf, Datasheet Version="Rev. 5, 10/2016", Depth=1.6mm, Height=0.55mm, Lead Free=LeadFree, Length=3.1mm, Manufacturer URL=http://www.yageo.com/, Military Standard=Not, Packaging=TapeandReel, REACH SVHC=Unknown, RoHSCompliant=true, Termination=SMD/SMT
R8 R9: library part CMP-1659-00013-4, "Chip Resistor, 10 KOhm, +/- 1%, 0.125 W, -55 to 155 degC, 0805 (2012 Metric), RoHS, Tape and Reel", Manufacturer=Yageo, Max Operating Temperature="155 degC", Min Operating Temperature="-55 degC", Package Quantity=5000, Voltage Rating="150 V", ComponentLink1Description="Manufacturer URL", ComponentLink1URL=http://www.yageo.com/, ComponentLink2Description=Datasheet, ComponentLink2URL=http://www.yageo.com/documents/recent/PYu-RC_Group_51_RoHS_L_04.pdf, DatasheetVersion="Rev. 4, 02/2016", Height="0.5 mm", Length="2 mm", Mount="Surface Mount", Mounting Technology="Surface Mount", PackageDescription="2-Pin Surface Mounted Device, Body 2 x 1.25 mm", PackageReference=0805, Packaging="Tape and Reel", Pins=2, REACH SVHC="No SVHC", RoHSCompliant=true
R10 R12 R13 R14 R15 R16: library part CMP-2001-00419-1, "2012", Manufacturer=Panasonic, Part Number=ERJ-6GEYJ471V
R11: library part CMP-2001-00419-1, "ERJ-6GEYJ471V", Manufacturer=Panasonic, Part Number=ERJ-6GEYJ471V
R17 R18 RSET: library part CMP-2100-03671-1, "Chip Resistor, 1 KOhm, +/- 1%, 125 mW, -55 to 155 degC, 0805 (2012 Metric), RoHS, Tape and Reel", Case Code (Imperial)=0805, Case Code (Metric)=2012, Manufacturer=Yageo, Max Operating Temperature=155degC, Max Power Dissipation=125mW, Min Operating Temperature=-55degC, Package Description="2-Pin Surface Mounted Device, Body 2 x 1.25 mm", Package Quantity=1, Resistance=1KOhm, Temperature Coefficient=100ppm/degreesC, Tolerance=1%, Voltage Rating=150V, Case/Package=0805, Composition=ThickFilm, Datasheet URL=http://www.yageo.com/NewPortal/yageodocoutput?fileName=/pdf/R-Chip/PYu-RC_Group_51_RoHS_L_5.pdf, Datasheet Version="Rev. 5, 10/2016", Depth=1.25mm, Height=0.024inch, Lead Free=LeadFree, Length=0.079inch, Manufacturer URL=http://www.yageo.com/, Military Standard=Not, Number of Pins=2, Number of Terminations=2, Package Reference=0805, Packaging=TapeandReel, Power Rating=125mW, REACH SVHC=Unknown, RoHSCompliant=true, Termination=SMD/SMT, Voltage Rating (DC)=150V, Width=0.049inch
RDPPM: library part CMP-2000-04029-1, Manufacturer=Yageo, Part Number=RC0603FR-0737K4L
RTMR: library part CMP-1013-00711-1, "60K4 0.125W 1% 0805 (2012 Metric)  SMD", Case-EIA=0805, Case-Metric=2012, Power="0.125 W", Tolerance="1 %", Technology=SMT
STAT1: library part CMP-1426-00016-1, "LTST-C150GKT / 1206 green led", Color="Bright Green", PartNumber=LTST-C150GKT, ComponentLink1Description="Manufacturer URL", ComponentLink1URL=http://www.we-online.com, ComponentLink2Description=Datasheet, ComponentLink2URL=http://katalog.we-online.com/led/datasheet/150120VS75000.pdf, PackageReference=1206_A
STAT2: library part CMP-2000-06617-1, "LED Red, 62.5 mW, 50 mA, -30 to 85 degC, 2-Pin SMD, RoHS, Tape and Reel", Emitting Color=Red, Forward Current=30mA, Forward Voltage=2.4V, Manufacturer=Lite-On, Operating Temp Range=-55Cto85C, Operating Temperature Classification=Industrial, Package Description="2-Pin Surface Mount Device, Body 3.2 x 1.6 mm", Package Reference=C150KRKT, Package Type=ChipLed, Power Dissipation=75W, Reverse Voltage=5V, Test Current (It)=20mA, Chip Material=AlGaInP, Datasheet URL=http://optoelectronics.liteon.com/upload/download/DS-22-99-0149/S_110_LTST-C150KRKT.pdf, Datasheet Version="Rev. C, 01/2013", DELETED=Compliant, Dominant Wave Length=631nm, High Brightness=Yes, Lens Dimensions=2.06X1.6X0.6mm, Lum Intensity=54mcd, Luminous Intensity=54mcd, Main Category=ChipLED, Manufacturer URL=http://www.us.liteon.com/, Mounting=SurfaceMount, Mounting Technology=SurfaceMount, Number of  Elements=1, Packaging=TapeandReel, Peak Wavelength=639nm, Pin Count=2, Product Depth (mm)=1.6mm, Product Height (mm)=1.1mm, Product Length (mm)=3.2mm, Rad Hardened=No, Shape Type=Rectangular, Type=Uni-Color, Viewing Angle=130deg
TMP_SEL: "Switch", Manufacturer_Name=E-Switch, Mouser Part Number=612-EG1315AA, Arrow Part Number=EG1315AA, Datasheet Link=https://www.mouser.co.uk/datasheet/2/140/N131500-1501042.pdf, Height=1.4mm, Manufacturer_Part_Number=EG1315AA, Mouser Price/Stock=https://www.mouser.co.uk/ProductDetail/E-Switch/EG1315AA?qs=w%2Fv1CP2dgqqTYZUZmbcI7Q%3D%3D
U1: library part CMP-0321-00146-2, "Dual Input Li-Ion Charger with Dynamic Power Path, Output regulated to 4.4 V, Vbat 4.2 V, 4.3 V, -40 to 85 degC, 20-pin QFN (RHL), Green (RoHS & no Sb/Br)", Manufacturer="Texas Instruments", Over Voltage Protection=N, ComponentLink1Description=Datasheet, ComponentLink1URL=http://www.ti.com/general/docs/lit/getliterature.tsp?genericPartNumber=BQ24032A&fileType=pdf, DatasheetVersion=SLUS618H, Eco-Plan="Green (RoHS & no Sb/Br)", Lead Acid=N, Li-Ion=Y, Li-Polymer=Y, Mounting Technology="Surface Mount", NiCd=N, NiMH=N, PackageDescription="20-Leads Plastic Quad Flatpack No-Lead, 4.5 x 3.5 x 0.9 mm Body, 0.5 mm Pitch, Exposed Pad", PackageReference=RHL0020A, PackageVersion="revJ, Dec-2011", PartNumber=BQ24032ARHLR, SubFamily="Battery Charge Management", Vin(Min)(V)=4.3
U2: library part CMP-04948-000020-1, "SENSOR DIGITAL -55C-125C 6WSON", Ambient Temperature Range High=+150°C, Ambient Temperature Range Low=-55°C, Manufacturer="Texas Instruments", Max Supply Voltage=5.5V, Min Supply Voltage=1.9V, Operating Supply Current=3.5-135uA, Package=DRV0006A, Temperature="-55°C to +125°C", Temperature Range High=+125°C, Accuracy=0.2%, Automotive=No, Category=IC, ComponentLink2Description=Datasheet, ComponentLink2URL=http://www.ti.com/lit/ds/symlink/tmp116.pdf, Device Class L1=Sensors, Device Class L2="Temperature and Humidity Sensors", Device Class L3=unset, Digikey Description="SENSOR DIGITAL -55C-125C 6WSON", Height=0.8mm, Interface=I2C,SMBus, Lead Free=Yes, Manufacturer Part Number=TMP116NAIDRVT, Max Junction Temp=+150°C, Octopart=https://octopart.com/tmp116naidrvt-texas+instruments-82367759, Resolution=16bits, RoHS=TRUE, Standoff Height=0mm, Temperature Range Low=-55°C

## Via types
v1: diameter 1.27, hole 0.711, Top Layer to Bottom Layer, 32 vias
v2: diameter 0.5, hole 0.2, Top Layer to Bottom Layer, 6 vias

## Nets (pads, with @x,y where several pads share a name; then routed paths per layer and width w, separated by ;. In a path a pad name is that pad's centre, name@x,y a point inside that pad or via, vN(x,y) a via of type N, cw(c..) or ccw(c..) an arc to the next point about the centre after c; other vN are vias at no path point)
+3.3V: C9.2 C10.2 IC1.4 IC2.1 PL.3 PR.3 | length 83.1
  Top Layer w0.254: C10.2@30.136,58.52 C10.2 ; C10.2@30.15,59.004 31.628,60.482 IC2.1 ; v1(44.526,53.721) 45.169,54.364 IC1.4
  Top Layer w1.27: C10.2@29.947,58.649 29.947,55.524 35.89,49.581 40.234,45.237 40.234,11.938 ; PL.3 32.302,11.945 32.465,11.945 32.471,11.938 40.234,11.938 ; v1(38.684,52.349) 43.715,52.349 44.459,53.093 44.459,53.654 v1(44.526,53.721) ; PR.3 40.234,11.938
  Bottom Layer w1.27: v1(35.865,49.555) 35.89,49.555 v1(38.684,52.349)
+3.3V_CHRG_LDO: R11.2 R12.2 R13.2 R14.2 R15.2 TMP_PWR.1 | length 49.7
  Top Layer w0.254: R14.2@4.801,17.285 v1(6.35,17.285) R12.2@8.255,17.285 ; R13.2 17.514,16.031 19.549,13.995 22.174,13.995 22.835,14.656 TMP_PWR.1 ; 24.34,9.693 24.507,9.525
  Top Layer w0.508: R15.2 23.012,5.842 24.507,7.337 24.507,9.525 24.507,16.085 24.21,16.383 TMP_PWR.1 ; R11.2 24.34,9.693
  Bottom Layer w0.254: v1(6.35,17.285) 13.449,17.285 17.272,13.462 19.914,13.462 TMP_PWR.1
GND: BATT1.1 BATT2.1 BATT3.1 C1.1 C2.1 C3.1 C4.1 C6.1 C7.1 C8.1 C9.1 C10.1 IC1.5 IC1.11 IC2.3 IC2.4 IC2.8 J1.5 J1.6 J1.7 J1.8 J1.9 J1.10 J1.11 J2.2 J2.3 LED1.1 LED2.1 LED3.1 LED4.1 PL.1 PR.1 R6.1 R7.1 R16.1 RDPPM.1 RSET.1 RTMR.1 U1.11 U1.21 U2.2 | length 178.7
  Top Layer w0.24: 45.191,75.626 U1.11@45.191,76.092
  Top Layer w0.254: 1.443,76.311 J1.8 ; J1.7 J1.5 ; v1(8.915,12.573) 10.016,11.472 13.413,11.472 ; LED4.1 11.962,36.118 11.389,36.691 11.339,36.691 9.627,38.403 v1(9.627,41.58) ; LED3.1 11.962,39.843 11.389,40.416 10.892,40.416 9.728,41.58 v1(9.627,41.58) ; LED2.1 11.962,43.469 11.389,42.896 11.348,42.896 10.226,41.774 9.821,41.774 v1(9.627,41.58) ; LED1.1 11.962,47.337 11.389,46.764 11.339,46.764 9.627,45.051 v1(9.627,41.58) ; C7.1 19.709,8.257 R16.1 21.568,8.128 22.076,7.62 v1(22.225,7.62) ; 23.818,89.017 23.851,89.017 ; 29.82,74.143 29.87,74.092 C8.1 ; C10.1@31.577,58.428 31.536,58.47 C10.1 ; IC2.3@33.179,59.182 31.959,59.182 31.536,58.759 C10.1 ; IC2.3@33.179,59.277 IC2.3 ; IC2.4 31.678,58.532 C10.1 ; IC2.8 35.804,60.452 37.846,60.452 38.006,60.612 38.006,61.375 R7.1 ; 45.085,69.85 v1(46.355,71.12) ; C9.1 45.847,52.043 45.847,53.143 IC1.5 ; IC1.11 IC1.11@48.895,54.991 ; R6.1 52.883,48.082 v1(54.61,46.355) ; RDPPM.1 53.338,72.39 RDPPM.1@53.419,72.39
  Top Layer w0.3: 13.413,11.472 U2.2@14.004,11.472
  Top Layer w0.508: C9.1@45.847,52.043 47.598,52.043 48.768,53.213 IC1.11 ; IC1.11@48.895,54.991 48.895,56.515 49.53,57.15 v1(55.88,57.15)
  Top Layer w0.762: C10.1@31.577,58.428 31.577,57.337 32.302,56.612 32.923,56.612 v1(33.02,56.515) ; C2.1 v1(39.243,85.278) C3.1 ; RSET.1 45.085,69.85 ; C4.1 53.721,77.724 v1(54.61,76.835) 54.61,76.698 54.127,76.214 RTMR.1 ; RDPPM.1@53.419,72.39 54.799,72.39 55.245,71.944 v1(55.245,67.31)
  Top Layer w1.016: v1(3.302,86.868) 5.451,89.017 11.874,89.017 ; BATT3.1 11.874,89.017 ; BATT2.1 22.177,89.017 ; 23.818,89.017 22.177,89.017 ; 23.851,89.017 32.48,89.017 ; BATT1.1 32.48,89.017 ; C1.1 45.457,88.422 44.862,89.017 32.48,89.017 ; 11.874,89.017 22.177,89.017
  Top Layer w1.524: J1.9 1.443,70.511 J1.11 J1.10 1.443,76.311
  Top Layer w1.905: R7.1@38.1,61.722 38.1,64.135 41.275,67.31 v1(55.245,67.31)
  Bottom Layer w0.762: v1(33.02,56.515) v1(33.02,64.77)
  Bottom Layer w1.016: BATT1.1 37.145,87.376 v1(39.243,85.278)
  other v1: 46.355,68.58
  other v2: 44.441,77.211 43.666,78.486 45.216,78.486 44.441,79.761
NetBATT1_2: BATT1.2 TMP_SEL.4 | length 21.8
  Bottom Layer w0.254: BATT1.2 31.496,88.392 50.038,88.392 50.532,87.898 TMP_SEL.4
NetBATT1_3: BATT1.3 BATT2.3 BATT3.3 C5.2 C6.2 C8.2 U1.5 U1.6 | length 54
  Top Layer w0.24: 42.113,78.236 U1.6@42.787,78.236 ; 42.113,78.736 U1.5@42.77,78.736
  Top Layer w0.254: C5.2 33.561,72.111 C8.2 33.719,74.25 C6.2@33.719,76.556
  Top Layer w0.762: 39.141,76.632 40.746,78.236
  Top Layer w1.27: C6.2@33.693,76.708 v1(36.576,76.708)
  Bottom Layer w0.254: 21.987,83.566 22.352,83.566
  Bottom Layer w1.27: BATT3.3 7.874,85.852 10.16,83.566 21.987,83.566 ; BATT2.3 18.192,87.361 18.192,83.566 ; 22.352,83.566 28.48,83.566 ; BATT1.3 28.48,83.566 ; v1(36.576,76.708) 36.576,78.994 32.004,83.566 28.48,83.566
NetBATT2_2: BATT2.2 TMP_SEL.2 | length 37.2
  Bottom Layer w0.254: BATT2.2 21.701,88.9 54.356,88.9 55.032,88.224 TMP_SEL.2
NetBATT3_2: BATT3.2 TMP_SEL.1 | length 49.1
  Bottom Layer w0.254: BATT3.2 11.906,89.408 54.864,89.408 56.501,87.771 56.501,86.821 TMP_SEL.1
NetC1_2: C1.2 D1.1 U1.20 USB_PTC.2 | length 51.5
  Top Layer w0.24: U1.20@45.191,80.663 45.191,81.328
  Top Layer w0.254: 6.685,82.274 6.834,82.423 ; USB_PTC.2@7.105,80.553 7.4,79.649 USB_PTC.2@7.398,79.649 ; 45.441,82.017 45.491,82.017
  Top Layer w0.508: USB_PTC.2@7.398,79.654 D1.1 ; 45.191,81.328 45.491,81.628 45.491,82.017
  Top Layer w0.762: C1.2 45.491,84.106 45.491,82.956
  Top Layer w1.27: 33.972,85.884 34.311,86.222 35.261,87.173 42.614,87.173 43.358,86.429 43.358,84.544 44.945,82.956 45.491,82.956
  Top Layer w1.905: USB_PTC.2 6.685,82.274 ; 6.834,82.423 30.505,82.423 33.628,85.545 33.634,85.545 33.972,85.884 ; 34.311,86.222 34.311,86.228
NetC2_2: C2.2 D2.1 JACK_PTC.2 U1.4 | length 57
  Top Layer w0.24: 42.113,79.236 U1.4@42.639,79.236
  Top Layer w0.254: 33.096,79.248 33.426,79.248 ; 41.715,79.223 42.1,79.223
  Top Layer w0.508: JACK_PTC.2 6.683,70.774 8.4,72.492 D2.1 ; 40.586,79.248 40.612,79.223 41.715,79.223
  Top Layer w0.762: 38.862,79.248 39.737,79.248 39.741,79.252 40.582,79.252 40.586,79.248
  Top Layer w1.016: 33.426,79.248 34.033,79.854 34.033,82.039 35.18,83.186 36.842,83.186 37.034,83.378 C2.2
  Top Layer w1.905: JACK_PTC.2@6.96,67.107 15.037,67.107 27.178,79.248 33.096,79.248 ; 33.426,79.248 38.862,79.248
NetC3_2: C3.2 TMP_PWR.2 U1.1 | length 82.6
  Top Layer w0.24: U1.1 43.691,81.328
  Top Layer w0.254: v1(39.37,83.312) v1@39.436,83.378
  Top Layer w0.508: C3.2@41.793,83.226 43.691,81.328
  Top Layer w0.762: v1@39.436,83.378 C3.2
  Bottom Layer w0.254: 41.614,81.788 41.656,81.746
  Bottom Layer w0.762: TMP_PWR.2 20.295,55.855 41.656,77.216 41.656,81.746 ; v1(39.37,83.312) 39.467,83.215 40.188,83.215 41.614,81.788
NetC4_2: C4.2 P1.2 R10.2 U1.15 U1.16 U1.17 | length 88
  Top Layer w0.24: U1.15 46.881,78.236 ; U1.16 46.881,78.736 ; U1.17@46.099,79.236 46.888,79.236
  Top Layer w0.254: C4.2@52.564,79.629 C4.2
  Top Layer w0.635: 46.881,78.753 49.009,78.753 49.886,79.629 C4.2@52.564,79.629
  Top Layer w1.016: R10.2 55.118,9.783 55.372,9.529 P1.2
  Top Layer w1.27: C4.2 54.971,79.624 58.42,76.175 58.42,10.142 57.676,9.398 P1.2
NetC5_1: C5.1 RSET.2 U1.10 | length 12.3
  Top Layer w0.24: 43.691,75.619 U1.10
  Top Layer w0.254: C5.1 35.687,71.882 42.164,71.882 42.164,71.979 44.221,74.036 44.221,74.773 43.691,75.303 43.691,75.619
NetC7_2: C7.2 R11.1 U2.5 | length 6
  Top Layer w0.254: 16.585,11.472 17.789,11.472 18.085,11.176 C7.2@19.701,11.176 ; C7.2 C7.2@19.701,11.176 ; R11.1 19.768,11.243 C7.2@19.701,11.176
  Top Layer w0.3: U2.5@16.001,11.472 16.585,11.472
NetD1_2: D1.2 D2.2 R17.2 R18.2 | length 7.7
  Top Layer w0.254: R17.2@11.915,77.368 R17.2 R17.2@12.157,77.102
  Top Layer w0.508: R17.2@11.915,77.368 D1.2 ; R18.2 R17.2@12.157,77.102 ; R18.2@12.346,74.566 12.503,74.408 12.503,74.22 D2.2
NetIC1_1: IC1.1 P2.2 | length 10
  Top Layer w0.254: IC1.1 46.568,57.414 ; P2.2@52.934,62.154 P2.2
  Top Layer w0.508: 46.568,57.414 51.308,62.154 P2.2@52.934,62.154
NetIC1_2: IC1.2 IC2.7 R7.2 | length 11.3
  Top Layer w0.254: IC2.7 37.704,59.832 38.006,59.53 38.006,58.513 R7.2 ; 44.391,55.364 IC1.2
  Top Layer w0.762: R7.2 38.311,58.208 39.506,58.208 42.393,55.321
NetIC1_3: IC1.3 P2.1 | length 9.4
  Top Layer w0.254: IC1.3 46.588,54.884 47.405,54.884 47.598,55.077 47.598,55.091 47.625,55.118 47.625,56.82
  Top Layer w0.508: 47.625,56.82 50.343,59.538 P2.1
NetIC1_6: IC1.6 PR.14 | length 15.4
  Top Layer w0.254: PR.14 50.968,43.348 IC1.6
NetIC1_7: IC1.7 R5.1 R6.2 | length 7
  Top Layer w0.254: IC1.7@50.985,54.381 IC1.7 50.988,54.344 51.805,54.344 52.883,53.266 R6.2 54.962,50.887 R5.1
NetIC1_8: IC1.8 R5.2 | length 5
  Top Layer w0.254: IC1.8 52.945,54.864 54.494,53.315 54.494,53.14 54.867,52.767 R5.2
NetIC1_9: IC1.9 PR.12 | length 28.7
  Top Layer w0.254: PR.12 56.413,43.713 56.413,53.696 54.745,55.364 IC1.9
NetIC1_10: IC1.10 PR.11 | length 33.1
  Top Layer w0.254: PR.11 57.175,41.935 57.175,54.712 56.023,55.864 IC1.10
NetIC2_2: IC2.2 PR.13 | length 28.8
  Top Layer w0.254: IC2.2 33.916,59.832 34.544,59.204 34.544,53.518 45.085,42.977 45.085,39.751 PR.13
NetIC2_5: IC2.5 PR.9 | length 39.7
  Top Layer w0.254: IC2.5 35.774,53.558 39.319,50.013 v1(45.034,50.013)
  Bottom Layer w0.254: v1(45.034,50.013) 44.983,50.013 44.958,50.038 44.958,29.718 PR.9
NetJ1_1: J1.1 USB_PTC.1 | length 9.7
  Top Layer w0.254: USB_PTC.1 2.045,80.416 USB_PTC.1@2.056,80.405 ; 5.829,74.711 6.327,75.209
  Top Layer w0.381: J1.1 5.829,74.711
  Top Layer w0.762: 6.327,75.209 6.327,76.479
  Top Layer w1.905: USB_PTC.1@2.056,80.405 2.402,80.405 6.327,76.479
NetJ2_1: J2.1 JACK_PTC.1 | length 14.8
  Top Layer w0.254: J2.1@11.242,60.469 11.865,59.846 J2.1
  Top Layer w1.905: JACK_PTC.1 1.903,64.671 3.531,63.043 8.309,63.043 10.882,60.469 J2.1@11.242,60.469
NetLED1_2: LED1.2 R1.1 | length 2.2
  Top Layer w0.508: LED1.2 R1.1
NetLED2_2: LED2.2 R2.1 | length 2.3
  Top Layer w0.254: R2.1@17.101,43.519 R2.1
  Top Layer w0.508: LED2.2 R2.1@17.101,43.519
NetLED3_2: LED3.2 R3.1 | length 2.3
  Top Layer w0.254: LED3.2 LED3.2@15.01,39.841
  Top Layer w0.508: LED3.2@15.01,39.841 R3.1
NetLED4_2: LED4.2 R4.1 | length 2.2
  Top Layer w0.508: LED4.2 R4.1
NetP1_1: P1.1 PL.2 PR.2 R10.1 | length 24.3
  Top Layer w0.254: PL.2 PL.2@32.309,9.398 ; P1.1 P1.1@53.34,9.906
  Top Layer w1.016: P1.1 52.832,11.626 R10.1@53.34,12.134
  Top Layer w1.27: PL.2@32.309,9.398 PR.2 P1.1
NetPL_2: 
NetPL_3: 
NetPL_4: PL.4
NetPL_5: PL.5
NetPL_6: PL.6 R9.2 | length 12.4
  Top Layer w0.254: PL.6@32.496,19.37 PL.6 37.592,24.943 R9.2
NetPL_7: PL.7 R8.2 | length 8.8
  Top Layer w0.254: PL.7@32.573,22.149 PL.7 35.052,24.943 R8.2
NetPL_8: PL.8 U1.7 | length 58.3
  Top Layer w0.24: 42.12,77.736 U1.7@42.735,77.736
  Top Layer w0.254: v1(39.878,73.152) 39.878,76.073 41.529,77.724 42.108,77.724
  Bottom Layer w0.254: PL.8 39.624,32.055 39.878,32.309 39.878,73.003 40.027,73.152 v1(39.878,73.152)
NetPL_9: PL.9 R12.1 U2.1 | length 36.1
  Top Layer w0.254: 13.413,12.122 13.407,12.116 11.252,12.116 8.455,14.913 8.455,15.735 19.949,27.229 PL.9
  Top Layer w0.3: 13.413,12.122 U2.1@14.006,12.122
NetPL_10: PL.10 R13.1 U2.6 | length 31.6
  Top Layer w0.254: U2.6 15.961,16.231 15.961,17.434 24.435,25.908 33.274,25.908 34.036,26.67 34.036,27.991 PL.10
  Top Layer w0.3: U2.6@16.042,12.122 16.585,12.122
NetPL_11: PL.11 R14.1 U2.3 | length 52.1
  Top Layer w0.254: 13.413,10.822 13.411,10.82 8.738,10.82 4.318,15.24 4.318,15.786 2.892,15.786 2.743,15.935 2.743,19.431 11.506,28.194 28.143,28.194 PL.11 ; U2.3@14.009,10.82 U2.3
  Top Layer w0.3: 13.413,10.822 U2.3
NetPL_12: PL.12
NetPL_13: PL.13
NetPL_14: PL.14 R4.2 | length 13.5
  Top Layer w0.508: R4.2 25.908,36.068 29.769,39.929 PL.14
NetPL_15: PL.15 R3.2 | length 13
  Top Layer w0.508: R3.2 25.871,39.841 28.499,42.469 PL.15
NetPL_16: PL.16 R2.2 | length 12.4
  Top Layer w0.508: R2.2 25.834,43.614 27.229,45.009 PL.16
NetPL_17: PL.17 R1.2 | length 11.9
  Top Layer w0.254: PL.17@32.096,47.387 PL.17
  Top Layer w0.508: R1.2 PL.17@32.096,47.387
NetPR_4: PR.4
NetPR_5: PR.5 U1.8 | length 63.9
  Top Layer w0.24: 42.12,77.236 U1.8@42.727,77.236
  Top Layer w0.254: v1(41.351,74.32) 41.351,76.9 41.688,77.236 42.12,77.236
  Bottom Layer w0.254: v1(41.351,74.32) 41.351,23.165 PR.5
NetPR_6: PR.6 U1.9 | length 59.7
  Top Layer w0.24: 42.12,76.736 U1.9@42.719,76.736
  Top Layer w0.254: U1.9 42.791,74.908 43.053,74.646 v1(43.053,74.371)
  Bottom Layer w0.254: v1(43.053,74.371) 43.053,24.003 PR.6
NetPR_7: PR.7 U1.18 | length 66.2
  Top Layer w0.24: U1.18@46.198,79.736 46.888,79.736
  Top Layer w0.254: 46.888,79.736 48.748,79.736 50.209,81.197 50.971,81.197 v1(51.054,81.28)
  Bottom Layer w0.254: PR.7 51.054,25.654 v1(51.054,81.28)
NetPR_8: PR.8 U1.19 | length 61
  Top Layer w0.24: U1.19@46.193,80.236 46.888,80.236
  Top Layer w0.254: 46.888,80.236 47.32,80.668 47.32,80.67 48.184,81.534 v1(49.022,81.534)
  Bottom Layer w0.254: PR.8 49.098,26.238 49.098,81.458 v1(49.022,81.534)
NetPR_10: PR.10
NetPR_15: PR.15
NetPR_16: PR.16
NetPR_17: PR.17
NetR8_1: R8.1 STAT2.2 U1.3 | length 78.1
  Top Layer w0.24: 42.028,79.736 42.113,79.736 U1.3@42.76,79.736
  Top Layer w0.254: v1(40.386,80.772) 41.326,79.832 41.898,79.832 42.028,79.736
  Top Layer w0.508: v1(22.86,60.701) 22.86,60.442 22.743,60.325 22.86,60.208 22.86,58.928 35.052,46.736 R8.1
  Bottom Layer w0.254: STAT2.2@20.546,74.752 STAT2.2
  Bottom Layer w0.508: STAT2.2@20.574,74.168 22.86,71.882 v1(22.86,60.701) ; STAT2.2@20.574,74.651 23.47,74.651 25.832,72.288 35.204,72.288 40.386,77.47 v1(40.386,80.772)
NetR9_1: R9.1 STAT1.1 U1.2 | length 87.7
  Top Layer w0.24: 42.113,80.236 U1.2
  Top Layer w0.254: v1(37.846,81.28) 39.174,81.28 39.682,81.788 41.614,81.788 42.791,80.611 U1.2@42.791,80.243
  Top Layer w0.508: v1(21.101,62.376) 21.11,62.385 23.34,62.385 24.384,61.341 24.384,58.776 37.592,45.568 R9.1
  Bottom Layer w0.508: v1(21.101,62.376) 21.101,72.102 18.796,74.406 18.796,76.433 19.325,76.962 STAT1.1 24.333,76.962 27.559,73.736 35.382,73.736 37.846,76.2 v1(37.846,81.28)
NetR15_1: R15.1 R16.2 U2.4 | length 7
  Top Layer w0.254: U2.4 15.961,9.693 17.526,8.128 R16.2 R15.1
  Top Layer w0.3: U2.4 16.585,10.822
NetR17_1: R17.1 STAT1.2 | length 6
  Top Layer w0.254: R17.1 14.169,77.158 R17.1@14.294,77.158
  Top Layer w0.508: R17.1 R17.1@14.199,77.144 ; R17.1@14.294,77.158 14.294,77.364 14.515,77.585 14.721,77.585 16.028,78.892 v1(17.221,78.892)
  Bottom Layer w0.254: STAT1.2@17.221,77.113 STAT1.2
  Bottom Layer w0.508: STAT1.2@17.221,77.113 v1(17.221,78.892)
NetR18_1: R18.1 STAT2.1 | length 6.2
  Top Layer w0.508: R18.1 14.157,74.754 14.503,74.408 14.628,74.408 16.399,72.637 16.745,72.637 v1@16.891,72.492
  Bottom Layer w0.254: STAT2.1@16.914,74.417 16.812,74.518 STAT2.1
  Bottom Layer w0.508: v1(16.914,72.542) STAT2.1@16.914,74.417
NetRDPPM_2: RDPPM.2 U1.13 | length 8.1
  Top Layer w0.24: U1.13@46.119,77.236 46.835,77.236
  Top Layer w0.254: 46.835,77.236 47.605,77.236 51.546,73.295 51.546,72.663 RDPPM.2
NetRTMR_2: RTMR.2 U1.14 | length 7.2
  Top Layer w0.24: U1.14@46.126,77.736 46.835,77.736
  Top Layer w0.254: 46.835,77.736 48.35,77.736 51.17,74.916 51.787,74.916 RTMR.2
NetTMP_SEL_3: TMP_SEL.3 U1.12 | length 18.2
  Top Layer w0.24: U1.12 46.835,76.736
  Top Layer w0.254: U1.12 46.091,76.337 46.917,75.511 47.825,75.511 v1(47.828,75.514)
  Bottom Layer w0.254: v1(47.828,75.514) 47.825,75.517 47.825,82.344 48.285,82.804 51.562,82.804 52.032,83.274 TMP_SEL.3
pads on no net: IC2.6 J1.2 J1.3 J1.4 TMP_SEL.MH1 TMP_SEL.MH2 TMP_SEL.MP1 TMP_SEL.MP2 TMP_SEL.MP3 TMP_SEL.MP4 U2.7
copper on no net:
  other v2: 14.986,10.922 14.986,12.022

## Polygon pours and split planes (outlines as drawn)
GND on Top Layer "GND_L01_P007" (solid, pour order 7): 44.051,76.961 44.051,75.808 44.679,75.171 44.679,66.472 48.209,66.472 48.209,74.048 47.879,74.048 45.466,76.461 45.466,77.832 44.051,77.832
NetBATT1_3 on Top Layer "NETBATT1_3_L01_P002" (solid, pour order 2): 43.053,78.842 43.053,78.105 40.437,78.105 40.437,78.308 40.742,78.613 41.732,78.613 41.961,78.842
NetC1_2 on Top Layer "NETC1_2_L01_P022" (solid, pour order 22): 43.053,84.836 43.053,83.947 45.326,81.674 46.228,82.575 46.228,84.836
NetJ1_1 on Top Layer "NETJ1_1_L01_P021" (solid, pour order 21): 7.522,76.81 5.221,76.519 3.759,77.981 3.759,78.435 6.045,78.435
GND on Top Layer "GND_L01_P020" (solid, pour order 20): 3.454,71.907 3.073,71.501 3.073,69.698 5.156,69.698 5.156,71.476 4.826,71.806 4.826,71.984 3.48,71.984
NetIC1_2 on Top Layer "NETIC1_2_L01_P019" (solid, pour order 19): 44.944,55.46 43.129,53.645 37.211,53.645 37.211,58.318 37.49,58.598 40.796,58.598
GND on Top Layer "GND_L01_P018" (solid, pour order 18): 31.115,69.215 35.56,69.215 35.56,62.865 24.13,62.865 24.13,66.04
no net on Top Layer "NONET_L01_P017" (solid, pour order 17): 31.471,68.936
NetC1_2 on Top Layer "NETC1_2_L01_P004" (solid, pour order 4): 44.704,84.811 44.704,82.296 45.326,81.674 45.606,81.674 46.228,82.296 46.228,84.836 44.729,84.836
GND on Top Layer "GND_L01_P016" (solid, pour order 16): 1.27,50.165 1.27,61.595 6.985,61.595 6.985,60.325 11.43,55.88 18.415,55.88 18.415,50.165
GND on Top Layer "GND_L01_P015" (solid, pour order 15): 28.575,77.47 13.97,62.865 13.97,50.165 18.415,50.165 18.415,62.865 19.05,63.5 31.166,63.5 31.471,63.805 31.471,77.47
NetBATT1_3 on Top Layer "NETBATT1_3_L01_P006" (solid, pour order 6): 34.163,77.521 39.944,77.521 39.943,76.9 38.227,75.184 33.274,75.184 33.274,77.47
no net on Top Layer "NONET_L01_P005" (solid, pour order 5): 34.163,77.521
no net on Top Layer "NONET_L01_P003" (solid, pour order 3): 44.704,84.811
NetJ1_1 on Top Layer "NETJ1_1_L01_P001" (solid, pour order 1): 4.702,74.905 4.93,75.133 4.93,76.81 7.521,76.81 7.521,74.524 3.508,74.524 3.508,74.879 3.483,74.905
NetC4_2 on Top Layer "NETC4_2_L01_P000" (solid, pour order 0): 45.822,79.324 45.822,78.181 46.881,78.181 46.881,79.324
GND on Bottom Layer "GND_L02_P012" (solid, pour order 12): 51.435,13.97 52.07,14.605 52.07,82.55 59.055,82.55 59.055,1.27 57.785,1.27 50.8,8.255 50.8,8.89
no net on Bottom Layer "NONET_L02_P014" (solid, pour order 14): 54.61,20.32
no net on Bottom Layer "NONET_L02_P013" (solid, pour order 13): 54.61,20.32
GND on Bottom Layer "GND_L02_P011" (solid, pour order 11): 9.073,1.27 58.42,1.27 58.42,15.875 25.288,15.875 18.05,7.087 8.235,7.087
GND on Bottom Layer "GND_L02_P010" (solid, pour order 10): 5.588,82.55 5.588,89.662 1.016,89.662 1.016,82.55
GND on Bottom Layer "GND_L02_P009" (solid, pour order 9): 10.617,1.27 0.305,1.27 0.305,82.626 6.985,82.626 6.985,60.325 11.43,55.88 18.415,55.88 18.415,20.32 17.78,19.685 3.175,19.685 3.175,13.995 10.617,13.995
no net on Bottom Layer "NONET_L02_P008" (solid, pour order 8): 1.27,20.32

## Silkscreen, mask and mechanical layers (free items; w line width, h text height)
Top Overlay:
  text "Venti Smart Vent: Rev.1 /  / Designed By: / Lyubomyr Bilyk, / Ferencz Dominguez, / Liam Robinson" at 8.255,27.94 h0.64 r90
Bottom Overlay:
  drawing of 15 lines, arcs and shapes, not listed
Mechanical 1:
  lines w0.254: 0.025,0.991 1.016,0 59.004,0 59.995,0.991 59.995,89.002 59.004,89.992 1.016,89.992 0.025,89.002 0.025,1.041 0.025,0.991

## Text inside footprints (layer, text, board x,y; h text height)
J1: Mechanical 6 "PCB EDGE" at -0.107,80.611 h0.3 r270